# Altium PCB MicMixerPCB.PcbDoc
Units mil, origin at the board's own origin, x right, y up, seen from the top; angles counter-clockwise.
Board outline 6000 x 6000 mil, 2 copper layers (Top Layer, Bottom Layer); 76 components, 50 nets, 221 pads, 30 vias.
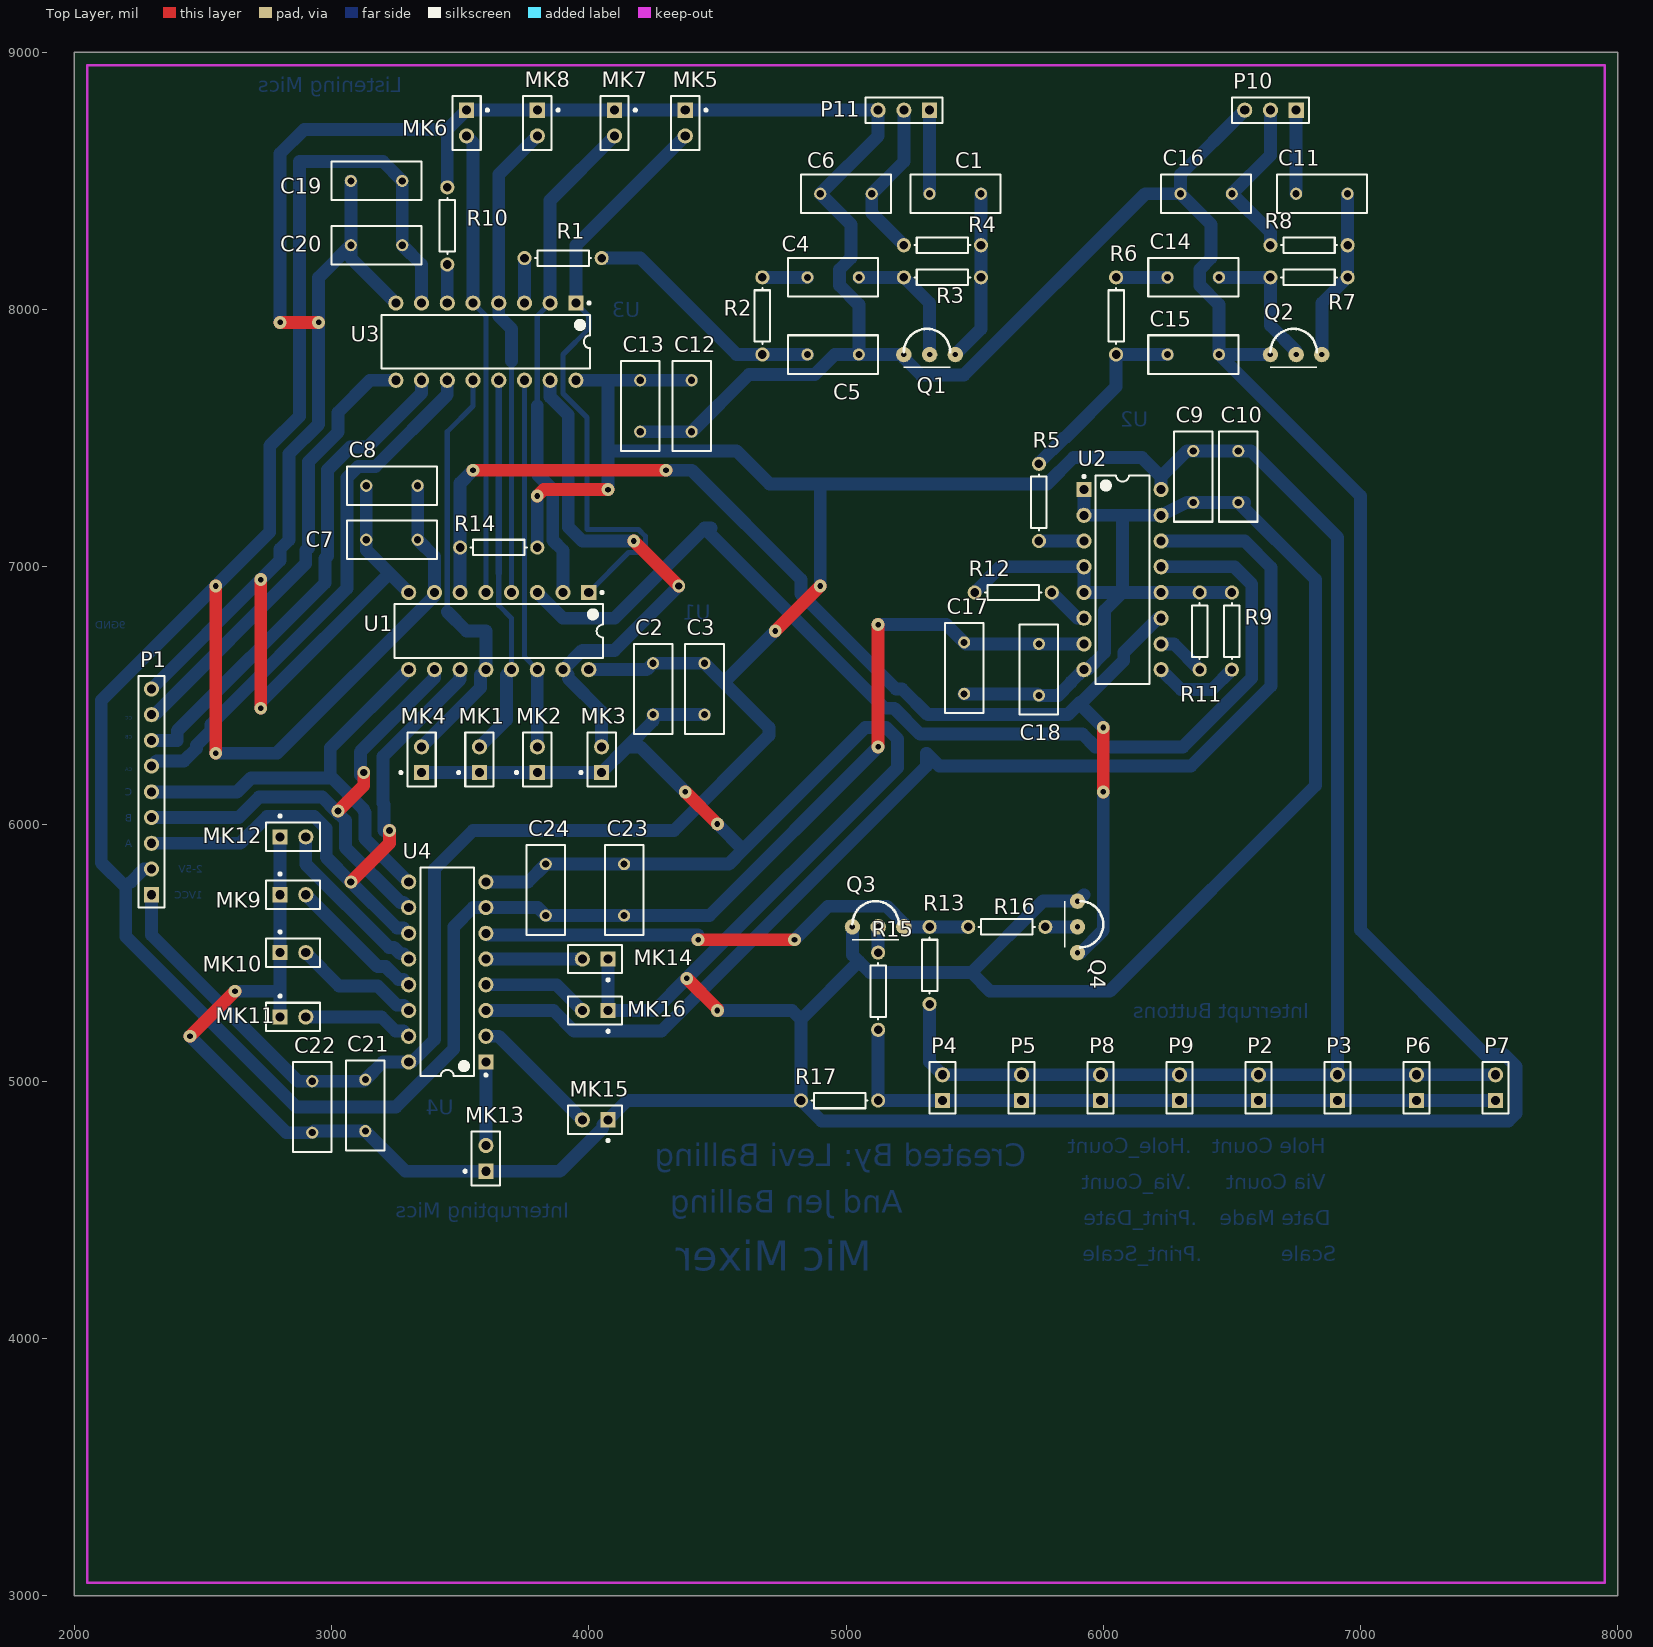
[diagram p0: Top Layer view]
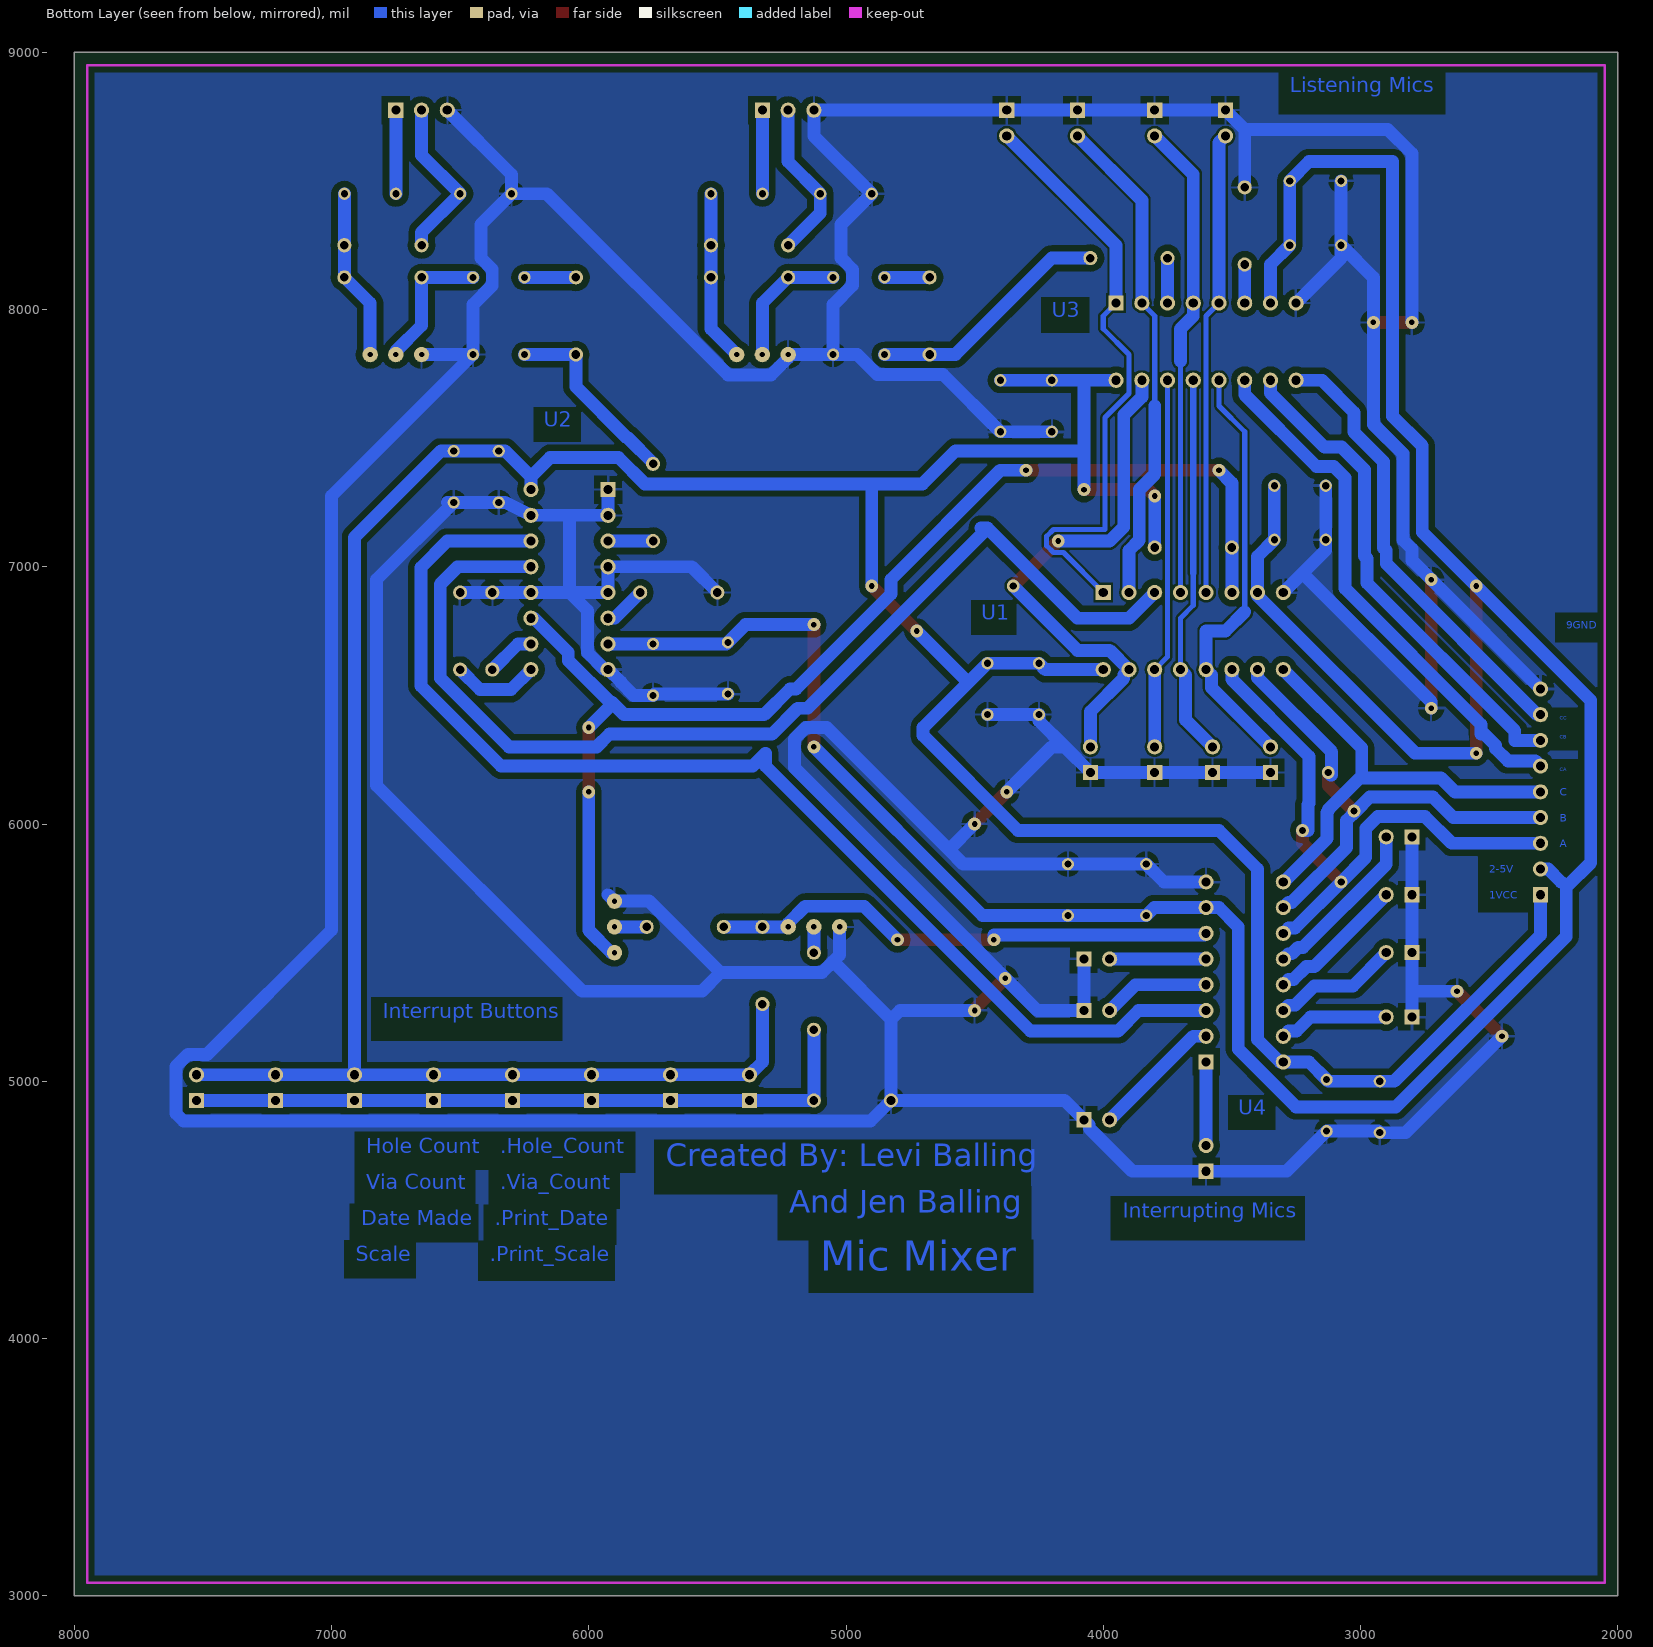
[diagram p1: Bottom Layer view, seen from below]

## Layer stack, top to bottom
Top Layer: signal copper 1.4
Dielectric: dielectric 12.6, FR-4, Dk 4.8
Bottom Layer: signal copper 1.4

## Board outline
2000,3000 8000,3000 8000,9000 2000,9000

## Design rules (kind name [scope] priority, off if disabled: settings)
Clearance micClearance [InNetClass('MicNets')] p1: gap=10
Clearance [All] p2: gap=25
PolygonConnect [All] p1: connectstyle=Relief reliefconductorwidth=10 reliefentries=4 polygonreliefangle="90 Angle"
RoomDefinition MicMixer [InComponentClass('MicMixer')] p1: confinementstyle=ConfineIn formatcopy=TRUE lockcomponents=FALSE outline 7950,3050 2050,3050 2050,8925 7950,8925
RoutingVias [All] p1: holewidth=22 width=50 viastyle="Through Hole" minholewidth=22 minwidth=50 maxholewidth=100 maxwidth=50
SilkscreenOverComponentPads [All] p1: minsilkscreentomaskgap=10
SolderMaskExpansion [All] p1: expansion=4
Width [All] p1: maxlimit=150 minlimit=5 preferedwidth=25 minimp=50.000000 maximp=50.000000 favimp=50.000000
27 further rules are at their usual default settings.

## Classes and differential pairs
net class MicNets: MIC1 MIC2 MIC3 MIC4 MIC5 MIC6 MIC7 MIC8
component class MicMixer: C1 C2 C4 C5 C6 C7 C8 C9 C10 C12 C13 C16 C17 C18 C19 C20 C21 C22 C23 C24 MK1 MK2 MK3 MK4 MK5 MK6 MK7 MK8 MK9 MK10 MK11 MK12 MK13 MK14 MK15 MK16 P1 P2 P3 P4 P5 P6 P7 P8 P9 P10 P11 Q1 Q2 Q3 Q4 R1 R2 R3 R4 R5 R6 R7 R8 R9 R10 R11 R12 R13 R14 R15 R16 R17 U1 U2 U3 U4

## Components (designator, comment, footprint, x,y, rotation, side; value= is the part's Value field where it differs from the comment)
C1 "Cap" RAD-0.2 5425,8450 r180 top
C2 "Cap" RAD-0.2 4250,6525 r90 top
C3 "Cap" RAD-0.2 4450,6525 r90 top
C4 "Cap" RAD-0.2 4950,8125 r180 top
C5 "Cap" RAD-0.2 4950,7825 r0 top
C6 "Cap" RAD-0.2 5000,8450 r180 top
C7 "Cap" RAD-0.2 3235,7105 r0 top
C8 "Cap" RAD-0.2 3235,7315 r0 top
C9 "Cap" RAD-0.2 6350,7350 r90 top
C10 "Cap" RAD-0.2 6525,7350 r90 top
C11 "Cap" RAD-0.2 6850,8450 r180 top
C12 "Cap" RAD-0.2 4400,7625 r90 top
C13 "Cap" RAD-0.2 4200,7625 r90 top
C14 "Cap" RAD-0.2 6350,8125 r180 top
C15 "Cap" RAD-0.2 6350,7825 r0 top
C16 "Cap" RAD-0.2 6400,8450 r180 top
C17 "Cap" RAD-0.2 5459.38,6606.06 r90 top
C18 "Cap" RAD-0.2 5750,6600 r90 top
C19 "Cap" RAD-0.2 3175,8500 r0 top
C20 "Cap" RAD-0.2 3175,8250 r0 top
C21 "Cap" RAD-0.2 3131.3,4906.06 r90 top
C22 "Cap" RAD-0.2 2925,4900 r90 top
C23 "Cap" RAD-0.2 4137.47,5743.94 r270 top
C24 "Cap" RAD-0.2 3832.78,5743.94 r270 top
MK1 "Mic1" PIN2 3575,6200 r90 top
MK2 "Mic1" PIN2 3800,6200 r90 top
MK3 "Mic1" PIN2 4050,6200 r90 top
MK4 "Mic1" PIN2 3350,6200 r90 top
MK5 "Mic1" PIN2 4375,8775 r270 top
MK6 "Mic1" PIN2 3525,8775 r270 top
MK7 "Mic1" PIN2 4100,8775 r270 top
MK8 "Mic1" PIN2 3800,8775 r270 top
MK9 "Mic1" PIN2 2800,5725 r0 top
MK10 "Mic1" PIN2 2800,5500 r0 top
MK11 "Mic1" PIN2 2800,5250 r0 top
MK12 "Mic1" PIN2 2800,5950 r0 top
MK13 "Mic1" PIN2 3600,4650 r90 top
MK14 "Mic1" PIN2 4075,5475 r180 top
MK15 "Mic1" PIN2 4075,4850 r180 top
MK16 "Mic1" PIN2 4075,5275 r180 top
P1 "Header 9" HDR1X9 2300,5725 r90 top
P2 "Header 2" HDR1X2 6603.57,4925 r90 top
P3 "Header 2" HDR1X2 6910.71,4925 r90 top
P4 "Header 2" HDR1X2 5375,4925 r90 top
P5 "Header 2" HDR1X2 5682.14,4925 r90 top
P6 "Header 2" HDR1X2 7217.86,4925 r90 top
P7 "Header 2" HDR1X2 7525,4925 r90 top
P8 "Header 2" HDR1X2 5989.29,4925 r90 top
P9 "Header 2" HDR1X2 6296.43,4925 r90 top
P10 "Header 3" HDR1X3 6750,8775 r180 top
P11 "Header 3" HDR1X3 5325,8775 r180 top
Q1 "BC548B" 2N3904 5225,7825 r0 top
Q2 "BC548B" 2N3904 6650,7825 r0 top
Q3 "2N3904" 2N3904 5025,5600 r0 top
Q4 "2N3904" 2N3904 5900,5700 r270 top
R1 "Res1" AXIAL-0.3 3900,8200 r0 top
R2 "Res1" AXIAL-0.3 4675,7975 r90 top
R3 "Res1" AXIAL-0.3 5375,8125 r0 top
R4 "Res1" AXIAL-0.3 5375,8250 r180 top
R5 "Res1" AXIAL-0.3 5750,7250 r90 top
R6 "Res1" AXIAL-0.3 6050,7975 r90 top
R7 "Res1" AXIAL-0.3 6800,8125 r0 top
R8 "Res1" AXIAL-0.3 6800,8250 r180 top
R9 "Res1" AXIAL-0.3 6500,6750 r270 top
R10 "Res1" AXIAL-0.3 3450,8325 r270 top
R11 "Res1" AXIAL-0.3 6375,6750 r270 top
R12 "Res1" AXIAL-0.3 5650,6900 r0 top
R13 "Res1" AXIAL-0.3 5325,5450 r90 top
R14 "Res1" AXIAL-0.3 3650,7075 r180 top
R15 "Res1" AXIAL-0.3 5125,5350 r270 top
R16 "Res1" AXIAL-0.3 5625,5600 r180 top
R17 "Res1" AXIAL-0.3 4975,4925 r0 top
U1 "CD4051BCN" N16E 3650,6750 r270 top
U2 "CD4051BCN" N16E 6075,6950 r0 top
U3 "CD4051BCN" N16E 3600,7875 r270 top
U4 "CD4051BCN" N16E 3450,5425 r180 top

## Footprints (in the part's own frame and the unit in brackets; to place one, negate y for a bottom-side part, rotate by r counter-clockwise, add the part's x,y. Pads: shape width x height; smd on the part's side, far side on the other; paste and mask are expansions set on the pad)
2N3904 [mil] "simple transistor, but bigger holes and pads"
  round 60 hole 21: 1(0,0) 2(100,0) 3(200,0)
  silkscreen extent 0,-50 180,100
AXIAL-0.3 [mm] "Axial Device, Thru-Hole; 2 Leads; 0.3 in Pin Spacing"
  round 1.4 hole 0.85: 1(-3.81,0) 2(3.81,0)
  silkscreen extent -2.77,-0.76 2.77,0.76
HDR1X2 [mm] "Connector; Header; 2 Position"
  rect 1.5x1.5 hole 0.9: 1(0,0)
  round 1.5 hole 0.9: 2(2.54,0)
  silkscreen extent -1.27,-1.27 3.81,1.27
HDR1X3 [mm] "Connector; Header; 3 Position"
  rect 1.5x1.5 hole 0.9: 1(0,0)
  round 1.5 hole 0.9: 2(2.54,0) 3(5.08,0)
  silkscreen extent -1.27,-1.27 6.35,1.27
HDR1X9 [mm] "Connector; Header; 9 Position"
  rect 1.5x1.5 hole 0.9: 1(0,0)
  round 1.5 hole 0.9: 2(2.54,0) 3(5.08,0) 4(7.62,0) 5(10.16,0) 6(12.7,0) 7(15.24,0) 8(17.78,0) 9(20.32,0)
  silkscreen extent -1.27,-1.27 21.59,1.27
N16E [mm] "DIP, 16-Leads, Row Spacing 7.62mm, Pitch 2.54mm, Body 19.3x6.35mm"
  rect 1.5x1.5 hole 0.9: 1(-3.81,8.89)
  round 1.5 hole 0.9: 2(-3.81,6.35) 3(-3.81,3.81) 4(-3.81,1.27) 5(-3.81,-1.27) 6(-3.81,-3.81) 7(-3.81,-6.35) 8(-3.81,-8.89) 9(3.81,-8.89) 10(3.81,-6.35) 11(3.81,-3.81) 12(3.81,-1.27) 13(3.81,1.27) 14(3.81,3.81) 15(3.81,6.35) 16(3.81,8.89)
  silkscreen extent -3.93,-10.3 2.65,10.32, body extent -3.6,-10.28 3.6,10.28, height 5.08
PIN2 [mm] "Photosensitive Diode; 2 Leads"
  rect 1.5x1.5 hole 0.9: 1(0,0)
  round 1.5 hole 0.9: 2(2.54,0)
  silkscreen extent -1.4,-1.4 3.94,2.17
RAD-0.2 [mm] "Radial Cap, Thru-Hole; 2 Leads; 0.2 in Pin Spacing"
  round 1.2 hole 0.7: 1(-2.54,0) 2(2.54,0)
  silkscreen extent -4.44,-1.91 4.44,1.91

## Part data
C1 C2 C3 C4 C5 C6 C7 C8 C9 C10 C11 C12 C13 C14 C15 C16 C17 C18 C19 C20 C21 C22 C23 C24: "Capacitor"
MK1 MK2 MK3 MK4 MK5 MK6 MK7 MK8 MK9 MK10 MK11 MK12 MK13 MK14 MK15 MK16: "Microphone"
P1: "Header, 9-Pin"
P2 P3 P4 P5 P6 P7 P8 P9: "Header, 2-Pin"
P10 P11: "Header, 3-Pin"
Q1 Q2: library part 2N3904, "NPN General Purpose Amplifier"
Q3 Q4: "NPN General Purpose Amplifier"
R1 R2 R3 R4 R5 R6 R7 R8 R9 R10 R11 R12 R13 R14 R15 R16 R17: "Resistor"
U1 U2 U3 U4: "8-Channel Analog Multiplexer/Demultiplexer"

## Via types
v1: diameter 50, hole 22, Top Layer to Bottom Layer, 25 vias
v2: diameter 50, hole 28, Top Layer to Bottom Layer, 5 vias

## Nets (pads, with @x,y where several pads share a name; then routed paths per layer and width w, separated by ;. In a path a pad name is that pad's centre, name@x,y a point inside that pad or via, vN(x,y) a via of type N, cw(c..) or ccw(c..) an arc to the next point about the centre after c; other vN are vias at no path point)
-5: C7.2 C8.2 C17.2 C18.2 C19.2 C20.2 C23.2 C24.2 P1.2 U1.7 U2.7 U3.7 U4.7 | length 12005.7
  Top Layer w50: v1(2550,6275) v1(2550,6925) ; v1(5125,6300) v1(5125,6775)
  Bottom Layer w50: 2220.23,5775 2270.23,5825 P1.2 ; v1(2550,6275) 2787.47,6275 3400,6887.53 U1.7 3400,7040 C7.2 C8.2 ; U3.7 3350,8175 C20.2 C19.2 3200,8575 2875,8575 2875,7585.33 2760,7470.33 2760,7135 v1(2550,6925) 2105,6480 2105,5849.77 2200,5754.77 2200,5562.87 2862.87,4900 3250,4900 3475,5125 3475,5600 3550,5675 U4.7 3801.71,5675 C24.2 C23.2 4468.94,5643.94 v1(5125,6300) ; v1(5125,6775) 5390.45,6775 C17.2 5465.45,6700 C18.2 U2.7
BABYMICTOPC: C6.1 P11.2 R4.2 | length 628.6
  Bottom Layer w50: R4.2 5100,8375 C6.1 5225,8575 P11.2
BUTTONDEMUXBUS: P2.1 P3.1 P4.1 P5.1 P6.1 P7.1 P8.1 P9.1 R15.2 R17.2 | length 2675
  Bottom Layer w50: R15.2 R17.2 P4.1 P5.1 P8.1 P9.1 P2.1 P3.1 P6.1 P7.1
COMPCNTRLDEMUXA: P1.6 U3.11 | length 2084.9
  Bottom Layer w50: P1.6 2320.47,6245.47 2426.54,6245.47 2475,6293.93 2475,6306.07 2518.93,6350 2531.07,6350 2531.07,6387.13 3060,6916.07 3060,7346.07 3103.93,7390 3171.07,7390 3450,7668.93 U3.11
COMPCNTRLDEMUXB: P1.7 U3.10 | length 1932.8
  Bottom Layer w50: P1.7 2400,6325 2400,6362.13 2975,6937.13 2975,7031.8 2985,7041.8 2985,7377.13 3072.87,7465 3140,7465 3350,7675 U3.10
COMPCNTRLDEMUXC: P1.8 U3.9 | length 1759.4
  Bottom Layer w50: P1.8 2312.47,6425 2900,7012.53 2900,7062.87 2910,7072.87 2910,7408.2 3025,7523.2 3025,7600 3150,7725 U3.9
DEMUX_A: P1.3 U1.11 U4.11 | length 2331.2
  Top Layer w50: v2(3075,5775) 3225,5925 v2(3225,5975)
  Bottom Layer w50: P1.3 2645.23,5925 2749.76,6029.53 2932.94,6029.53 2979.53,5982.94 2979.53,5870.47 v2(3075,5775) 3254.53,5595.47 3279.53,5595.47 U4.11 ; v2(3225,5975) 3204.53,5975 3204.53,6076.14 3200,6080.67 3200,6262.47 3500,6562.47 U1.11
DEMUX_B: P1.4 U1.10 U4.10 | length 2016.9
  Top Layer w50: v2(3025,6050) 3125,6150 v2(3125,6200)
  Bottom Layer w50: P1.4 2639.17,6025 2718.7,6104.53 2964.01,6104.53 v2@3018.53,6050 ; v2(3025,6050) v2@3018.53,6050 ; v2(3125,6200) 3115.33,6190.33 3111.95,6190.33 3111.95,6280.48 3400,6568.53 U1.10 ; U4.10 3279.53,5695.47 3267.06,5695.47 3054.53,5908 3054.53,6014.01 v2@3018.53,6050
DEMUX_C: P1.5 U1.9 U4.9 | length 1800
  Bottom Layer w50: P1.5 2633.1,6125 2687.63,6179.53 2995.07,6179.53 ; U4.9 3298.46,5775 3129.53,5943.93 3129.53,6045.07 3125,6049.6 3125,6056.07 3001.54,6179.53 2995.07,6179.53 ; U1.9 2995.07,6295.07 2995.07,6179.53
GND: C2.1 C3.1 C5.2 C6.2 C7.1 C8.1 C9.1 C10.1 C12.1 C13.1 C15.2 C16.2 C17.1 C18.1 C19.1 C20.1 C21.1 C22.1 C23.1 C24.1 MK1.1 MK2.1 MK3.1 MK4.1 MK5.1 MK6.1 MK7.1 MK8.1 MK9.1 MK10.1 MK11.1 MK12.1 MK13.1 MK14.1 MK15.1 MK16.1 P1.9 P10.3 P11.3 Q1.1 Q2.1 Q3.1 Q4.1 R9.1 R10.1 R11.1 R12.1 R17.1 U1.8 U2.1 U2.2 U2.4 U2.5 U2.8 U2.12 U2.15 U3.8 U4.8 | length 36858.7
  Top Layer w50: v1(2450,5175) v1(2625,5350) ; v1(2725,6450) v1(2725,6950) ; v1(2800,7950) v1(2950,7950) ; v1(4375,6125) v1(4500,6000) ; v1(4381.07,5400) 4500,5281.07 v1(4500,5275)
  Bottom Layer w50: P1.9 v1(2725,6950) 2800,7025 2800,7068.93 2835,7103.93 2835,7439.26 2950,7554.26 v1(2950,7950) 2950,8125 C20.1 ; v1(2450,5175) 2825,4800 C22.1 2931.06,4806.06 C21.1 3287.36,4650 MK13.1 3887.47,4650 4054.53,4817.06 4054.53,4829.53 MK15.1 4150,4925 R17.1 ; v1(2625,5350) 2800,5350 ; v1(2725,6450) 2725,6475 3225,6975 ; MK11.1 2800,5350 ; MK12.1 MK9.1 MK10.1 2800,5350 ; v1(2800,7950) 2800,8606.07 2893.93,8700 3450,8700 ; C19.1 C20.1 ; C8.1 C7.1 3135,7065 3225,6975 ; U3.8 3075,8200 C20.1 ; U1.8 3225,6975 ; MK4.1 MK1.1 MK2.1 MK3.1 4150,6300 ; R10.1 3450,8700 ; U4.8 3763.84,5775 C24.1 C23.1 4543.94,5843.94 4600,5900 ; MK14.1 MK16.1 4256.07,5275 v1(4381.07,5400) 5200,6218.93 5200,6331.07 5156.07,6375 5075,6375 4600,5900 ; C13.1 C12.1 4622.44,7747.44 4878.51,7747.44 4956.07,7825 C5.2 ; v1(4375,6125) 4200,6300 4150,6300 ; C3.1 C2.1 4250,6400 4150,6300 ; v1(4500,5275) 4790.31,5275 4825,5240.31 ; v1(4500,6000) 4600,5900 ; Q3.1 5025,5490.31 5050,5465.31 ; C17.1 5743.94,6506.06 C18.1 5825,6500 5875,6550 5875,6551.54 5923.46,6600 U2.8 5937.47,6600 6004.53,6667.06 6004.53,6829.53 6075,6900 ; R12.1 5600,7000 U2.4 U2.5 6075,6900 ; 5925,5725 Q4.1 5765.31,5700 5487.76,5422.44 ; U2.1 U2.2 6075,7200 ; R9.1 R11.1 U2.12 6075,6900 ; 6550,7250 C10.1 ; P10.3 6300,8525 C16.2 ; 6575,7825 C15.2 ; Q2.1 C15.2 ; 3450,8700 MK6.1 MK8.1 MK7.1 MK5.1 P11.3 5125,8675 C6.2 5018.93,8331.07 5018.93,8200 4975,8156.07 4975,8093.93 5050,8018.93 C5.2 ; R17.1 4904.53,4845.47 7575.24,4845.47 7604.53,4874.76 7604.53,5057.94 7557.94,5104.53 7483,5104.53 7000,5587.53 7000,7275 C15.2 ; R17.1 4825,5240.31 ; 4825,5240.31 5050,5465.31 ; 5050,5465.31 5092.87,5422.44 5487.76,5422.44 ; C5.2 Q1.1 5225,7811.86 5291.86,7745 5458.14,7745 6163.14,8450 C16.2 ; 5487.76,5422.44 5560.2,5350 6025,5350 6825,6150 6825,6950 C10.1 ; 6075,6900 6075,7200 ; 6075,7200 U2.15 6325,7250 C9.1 C10.1 ; C16.2 6418.93,8331.07 6418.93,8200 6375,8156.07 6375,8093.93 6450,8018.93 C15.2
INTERRUPT: Q3.3 R13.2 R16.2 U4.6 | length 1991.1
  Top Layer w50: v1(4425,5550) v1(4800,5550)
  Bottom Layer w50: U4.6 3606.06,5568.94 4425,5568.94 v1(4425,5550) ; v1(4800,5550) 4930,5680 5158.14,5680 5225,5613.14 Q3.3 R13.2 R16.2
INTERRUPTSIGNAL: U2.14 U4.3 | length 4642.3
  Bottom Layer w50: U4.3 3862.53,5275 3942.06,5195.47 4282.6,5195.47 5312.53,6225.4 5312.53,6275 5362.53,6225 6340.75,6225 6652.56,6536.81 6652.56,6997.44 6550,7100 U2.14
LISTENING: Q4.3 R14.2 U1.6 U2.11 | length 4830.9
  Top Layer w50: v1(3550,7375) v1(4300,7375) ; v1(6000,6125) v1(6000,6375)
  Bottom Layer w50: U1.6 R14.2 3500,7325 v1(3550,7375) ; v1(4300,7375) 4400,7375 4825,6950 4825,6893.93 5193.93,6525 5218.2,6525 5318.2,6425 5862.47,6425 5912.47,6475 ; Q4.3 5913.14,5500 6000,5586.86 v1(6000,6125) ; v1(6000,6375) 5912.47,6462.53 5912.47,6475 ; U2.11 6212.53,6800 6079.53,6667 6079.53,6635.99 5918.53,6475 5912.47,6475
LISTENINGSIGNAL: U1.3 U2.13 | length 4196.9
  Bottom Layer w50: U1.3 3900,6800 4100,6800 4450,7150 ; 4475,7150 4450,7150 ; U2.13 6509.69,7000 6577.56,6932.13 6577.56,6567.87 6309.69,6300 5968.93,6300 5918.93,6350 5287.13,6350 5187.13,6450 5150,6450 4450,7150
LISTENINTERRUPTMICTOPC: C16.1 P10.2 R8.2 | length 649.3
  Bottom Layer w50: R8.2 6650,8300 C16.1 6650,8600 P10.2
MIC1: MK1.2 U1.13 U3.13 | length 1497.5
  Bottom Layer w20: 3650,6975 3650,6850 3700,6800 U1.13
  Bottom Layer w25: 3650,6975 U3.13
  Bottom Layer w50: MK1.2 3679.53,6404.53 3679.53,6579.53 U1.13
MIC2: MK2.2 U1.14 U3.14 | length 1445.7
  Bottom Layer w20: U3.14 3750,6650 U1.14
  Bottom Layer w50: MK2.2 U1.14
MIC3: MK3.2 U1.15 U3.15 | length 2071
  Top Layer w50: v1(4175,7100) v2(4350,6925)
  Bottom Layer w50: U3.15 3850,7659.85 3920,7589.85 3920,7155 3975,7100 v1(4175,7100) ; MK3.2 4050,6437.53 3920.47,6567.06 3920.47,6579.53 U1.15 3975,6675 4100,6675 v2(4350,6925)
MIC4: MK4.2 U1.12 U3.12 | length 1676
  Bottom Layer w20: 3450,6825 3450,7525 3550,7625 U3.12
  Bottom Layer w50: MK4.2 3579.53,6529.53 3579.53,6579.53 U1.12 3600,6750 3525,6750 3450,6825
MIC5: MK5.2 U1.1 U3.1 | length 2376.6
  Bottom Layer w20: U3.1 4000,7975 4000,7925 3900,7825 3900,7673.49 3993.64,7579.85 3993.64,7145 4193.64,7145 4220,7118.64 4220,7081.36 4193.64,7055 4155,7055 U1.1
  Bottom Layer w50: U3.1 3950,8250 MK5.2
MIC6: MK6.2 U1.5 U3.5 | length 1806.1
  Bottom Layer w20: U3.5 3600,7975 3600,7650 U1.5
  Bottom Layer w50: MK6.2 3550,8650 U3.5
MIC7: MK7.2 U1.2 U3.2 | length 1940.7
  Bottom Layer w20: 3800,7625 3800,7975 U3.2
  Bottom Layer w50: 3800,7625 3800,7359.85 3860,7299.85 3860,7103.47 3900,7063.47 U1.2 ; U3.2 3850,8425 MK7.2
MIC8: MK8.2 U1.4 U3.4 | length 1857.8
  Bottom Layer w20: U1.4 3700,7650 3700,7800
  Bottom Layer w50: 3700,7800 3700,7925 3650,7975 U3.4 3650,8525 MK8.2
MIC9: MK9.2 U4.13 | length 545
  Bottom Layer w50: MK9.2 3179.53,5445.47 3210.99,5445.47 3260.99,5395.47 3279.53,5395.47 U4.13
MIC10: MK10.2 U4.14 | length 493.2
  Bottom Layer w50: MK10.2 3029.53,5370.47 3179.93,5370.47 3254.93,5295.47 3279.53,5295.47 U4.14
MIC11: MK11.2 U4.15 | length 431.1
  Bottom Layer w50: MK11.2 3194.33,5250 3248.86,5195.47 3279.53,5195.47 U4.15
MIC12: MK12.2 U4.12 | length 658.9
  Bottom Layer w50: MK12.2 2900,5843.93 3223.46,5520.47 3242.06,5520.47 3267.06,5495.47 3279.53,5495.47 U4.12
MIC13: MK13.2 U4.1 | length 325
  Bottom Layer w50: MK13.2 U4.1
MIC14: MK14.2 U4.5 | length 375
  Bottom Layer w50: U4.5 MK14.2
MIC15: MK15.2 U4.2 | length 509.6
  Bottom Layer w50: U4.2 3650,5175 MK15.2
MIC16: MK16.2 U4.4 | length 416.4
  Bottom Layer w50: U4.4 3875,5375 MK16.2
NetC1_1: C1.1 Q1.3 R3.2 R4.1 | length 666.4
  Bottom Layer w50: Q1.3 5525,7925 R3.2 R4.1 C1.1
NetC4_1: C4.1 Q1.2 R3.1 | length 516.4
  Bottom Layer w50: C4.1 R3.1 5325,8025 Q1.2
NetC4_2: C4.2 R2.2 | length 175
  Bottom Layer w50: R2.2 C4.2
NetC5_1: C5.1 R1.2 R2.1 | length 955.3
  Bottom Layer w50: R1.2 4200,8200 4575,7825 R2.1 C5.1
NetC11_1: C11.1 Q2.3 R7.2 R8.1 | length 666.4
  Bottom Layer w50: Q2.3 6850,8025 R7.2 R8.1 C11.1
NetC14_1: C14.1 Q2.2 R7.1 | length 541.4
  Bottom Layer w50: C14.1 R7.1 6650,7938.14 6750,7838.14 Q2.2
NetC14_2: C14.2 R6.2 | length 200
  Bottom Layer w50: R6.2 C14.2
NetC15_1: C15.1 R5.2 R6.1 | length 751.3
  Bottom Layer w50: R5.2 5750,7403.51 5846.49,7500 5850,7500 6050,7700 R6.1 C15.1
NetQ3_2: Q3.2 R15.1 | length 100
  Bottom Layer w50: R15.1 Q3.2
NetQ4_2: Q4.2 R16.1 | length 125
  Bottom Layer w50: R16.1 Q4.2
NetR5_1: R5.1 U2.3 | length 175
  Bottom Layer w50: R5.1 U2.3
NetR9_2: R9.2 U2.9 | length 339.3
  Bottom Layer w50: U2.9 6302.56,6522.44 6422.44,6522.44 R9.2
NetR10_2: R10.2 U3.6 | length 150
  Bottom Layer w50: U3.6 R10.2
NetR11_2: R11.2 U2.10 | length 191.4
  Bottom Layer w50: U2.10 6275,6700 R11.2
NetR12_2: R12.2 U2.6 | length 166.4
  Bottom Layer w50: R12.2 5900,6800 U2.6
PC+5V_BABY: C1.2 P11.1 | length 325
  Bottom Layer w50: C1.2 P11.1
PC+5V_LISTENINTERRUPT: C11.2 P10.1 | length 325
  Bottom Layer w50: C11.2 P10.1
PRE_AMP_BABY_MIC: R1.1 U3.3 | length 175
  Bottom Layer w50: U3.3 R1.1
VCC: C2.2 C3.2 C9.2 C10.2 C12.2 C13.2 C21.2 C22.2 P1.1 P2.2 P3.2 P4.2 P5.2 P6.2 P7.2 P8.2 P9.2 R13.1 R14.1 U1.16 U2.16 U3.16 U4.16 | length 14597.1
  Top Layer w50: v1(3800,7275) 3825,7300 v1(4075,7300) ; v1(4725,6750) v1(4900,6925)
  Bottom Layer w50: P1.1 2300,5568.93 2868.93,5000 C22.2 3125.24,5000 C21.2 3200.24,5075 U4.16 3312.47,5075 3400,5162.53 3400,5825 3550,5975 4331.07,5975 4700,6343.93 4700,6375 4525,6550 ; R14.1 v1(3800,7275) ; U3.16 4075,7725 ; U1.16 4225,6600 C2.2 C3.2 4525,6550 ; v1(4075,7300) 4075,7450 ; C12.2 C13.2 4075,7725 ; v1(4725,6750) 4525,6550 ; v1(4900,6925) 4900,7322.44 ; R13.1 5325,5075 P4.2 P5.2 P8.2 P9.2 P2.2 P3.2 ; U2.16 6225,7350 ; P7.2 P6.2 P3.2 ; 4075,7450 4575,7450 4702.56,7322.44 4900,7322.44 ; 4075,7450 4075,7725 ; 4900,7322.44 5782.13,7322.44 5884.69,7425 6150,7425 6225,7350 ; 6225,7350 6325,7450 C9.2 C10.2 6575,7450 6910.71,7114.29 P3.2

## Polygon pours and split planes (outlines as drawn)
GND on Bottom Layer "GNDPlane" (solid, pour order 2): 7950,3050 2050,3050 2050,8950 7950,8950

## Keep-outs
Keep-Out Layer:
  lines w10: 2050,3050 2050,8950 7950,8950 7950,3050 2050,3050

## Other copper
Bottom Layer:
  text "Listening Mics" at 3275,8825 h100
  text "U3" at 4200,7950 h100
  text "U2" at 6175,7525 h100
  text "U1" at 4475,6775 h100
  text "9GND" at 2200,6750 h50
  text "CC" at 2225,6400 h25
  text "CB" at 2225,6325 h25
  text "CA" at 2225,6200 h25
  text "C" at 2225,6100 h50
  text "B" at 2225,6000 h50
  text "A" at 2225,5900 h50
  text "2-5V" at 2500,5800 h50
  text "1VCC" at 2500,5700 h50
  text "Interrupt Buttons" at 6800,5225 h100
  text "U4" at 3475,4850 h100
  text ".Hole_Count" at 6345,4700 h100
  text "Hole Count" at 6865,4700 h100
  text "Created By: Levi Balling" at 5700,4640 h150
  text ".Via_Count" at 6345,4560 h100
  text "Via Count" at 6865,4560 h100
  text "And Jen Balling" at 5220,4460 h150
  text "Interrupting Mics" at 3925,4450 h100
  text ".Print_Date" at 6365,4420 h100
  text "Date Made" at 6885,4420 h100
  text ".Print_Scale" at 6385,4280 h100
  text "Scale" at 6905,4280 h100
  text "Mic Mixer" at 5100,4225 h200

## Silkscreen, mask and mechanical layers (free items; w line width, h text height)
Drill Drawing:
  text ".LEGEND" at 8200,3200 h60
  text "Drill Drawing." at 8200,3100 h60

## Dimensions
2050,3050 to 2050,8950 on Mechanical 1
2050,3050 to 7950,3050 on Mechanical 1